# Altium PCB MKISEC 4L.PcbDoc
Units mm, origin at the board's own origin, x right, y up, seen from the top; angles counter-clockwise.
Board outline 61 x 34.4 mm, 4 copper layers (Top Layer, Int1, Int2, Bottom Layer), stack 1.586 mm thick; 2 components, 1 nets, 16 pads, 11 vias.
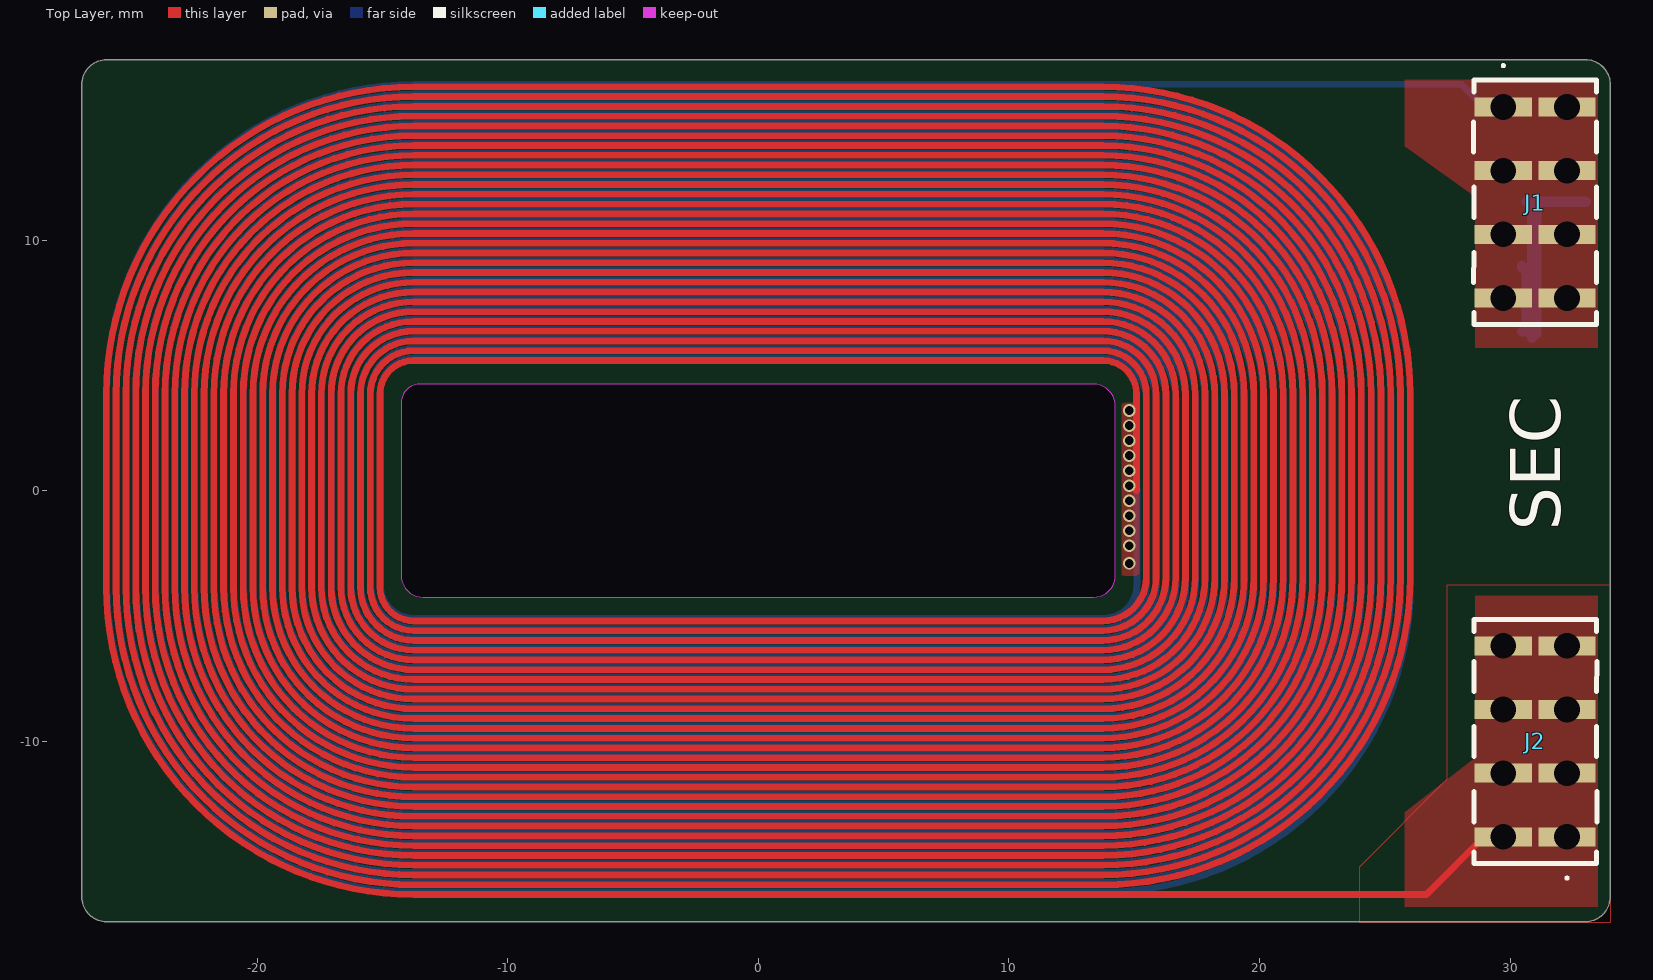
[diagram p0: Top Layer view]
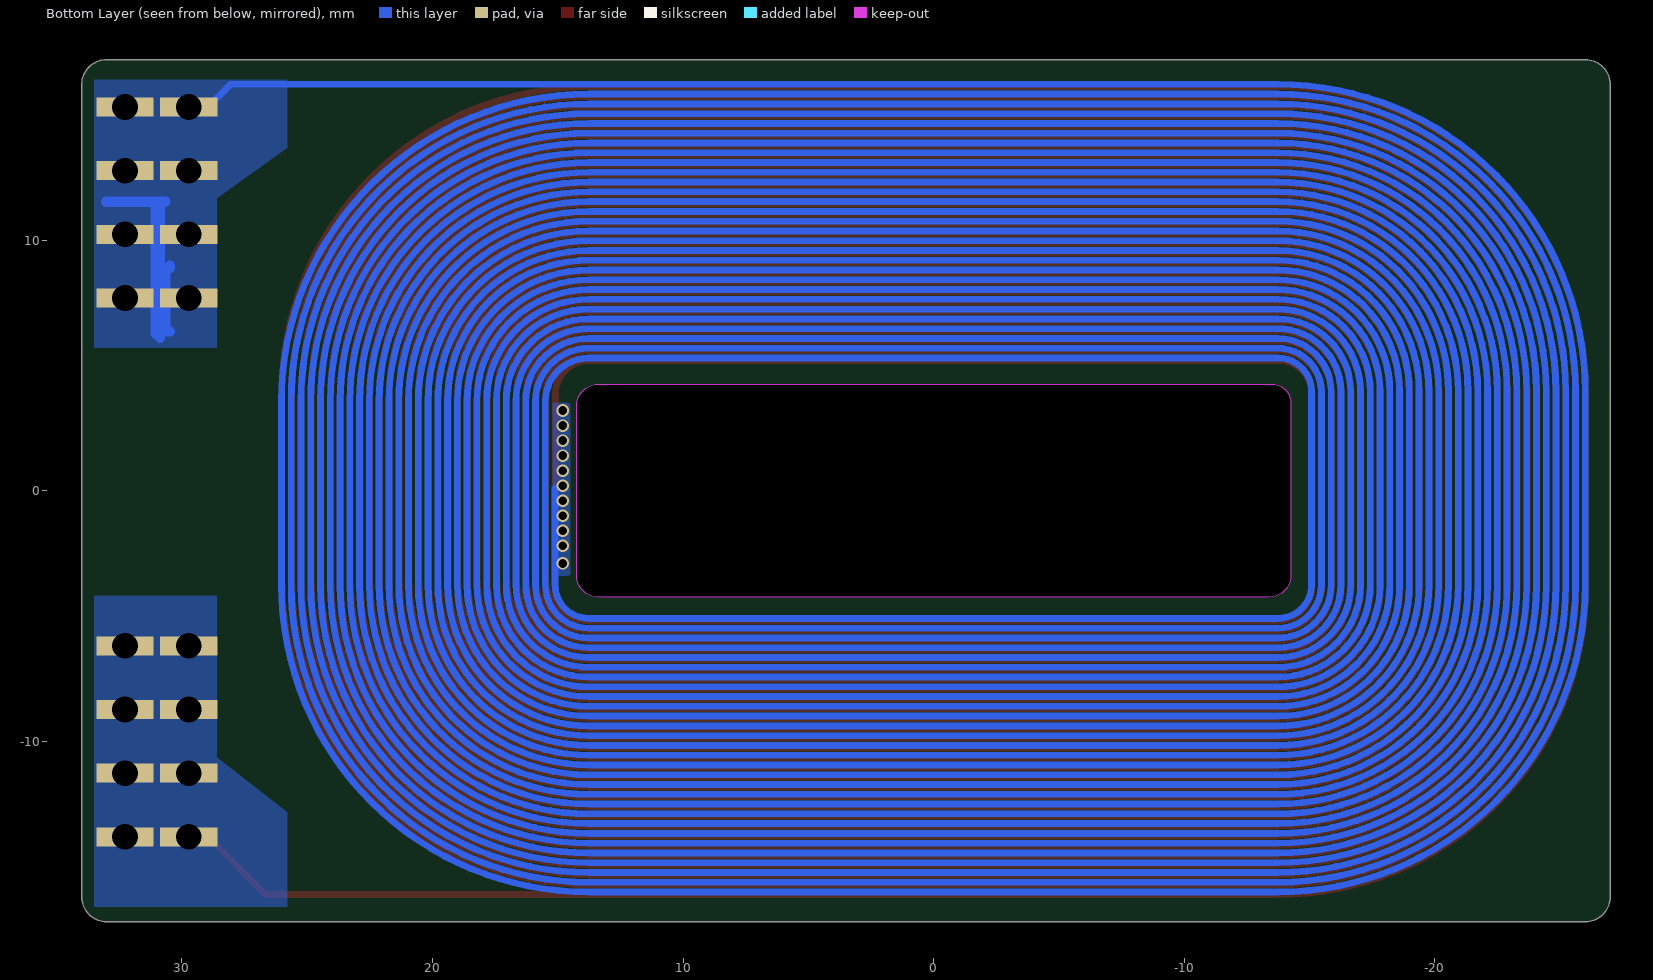
[diagram p1: Bottom Layer view, seen from below]
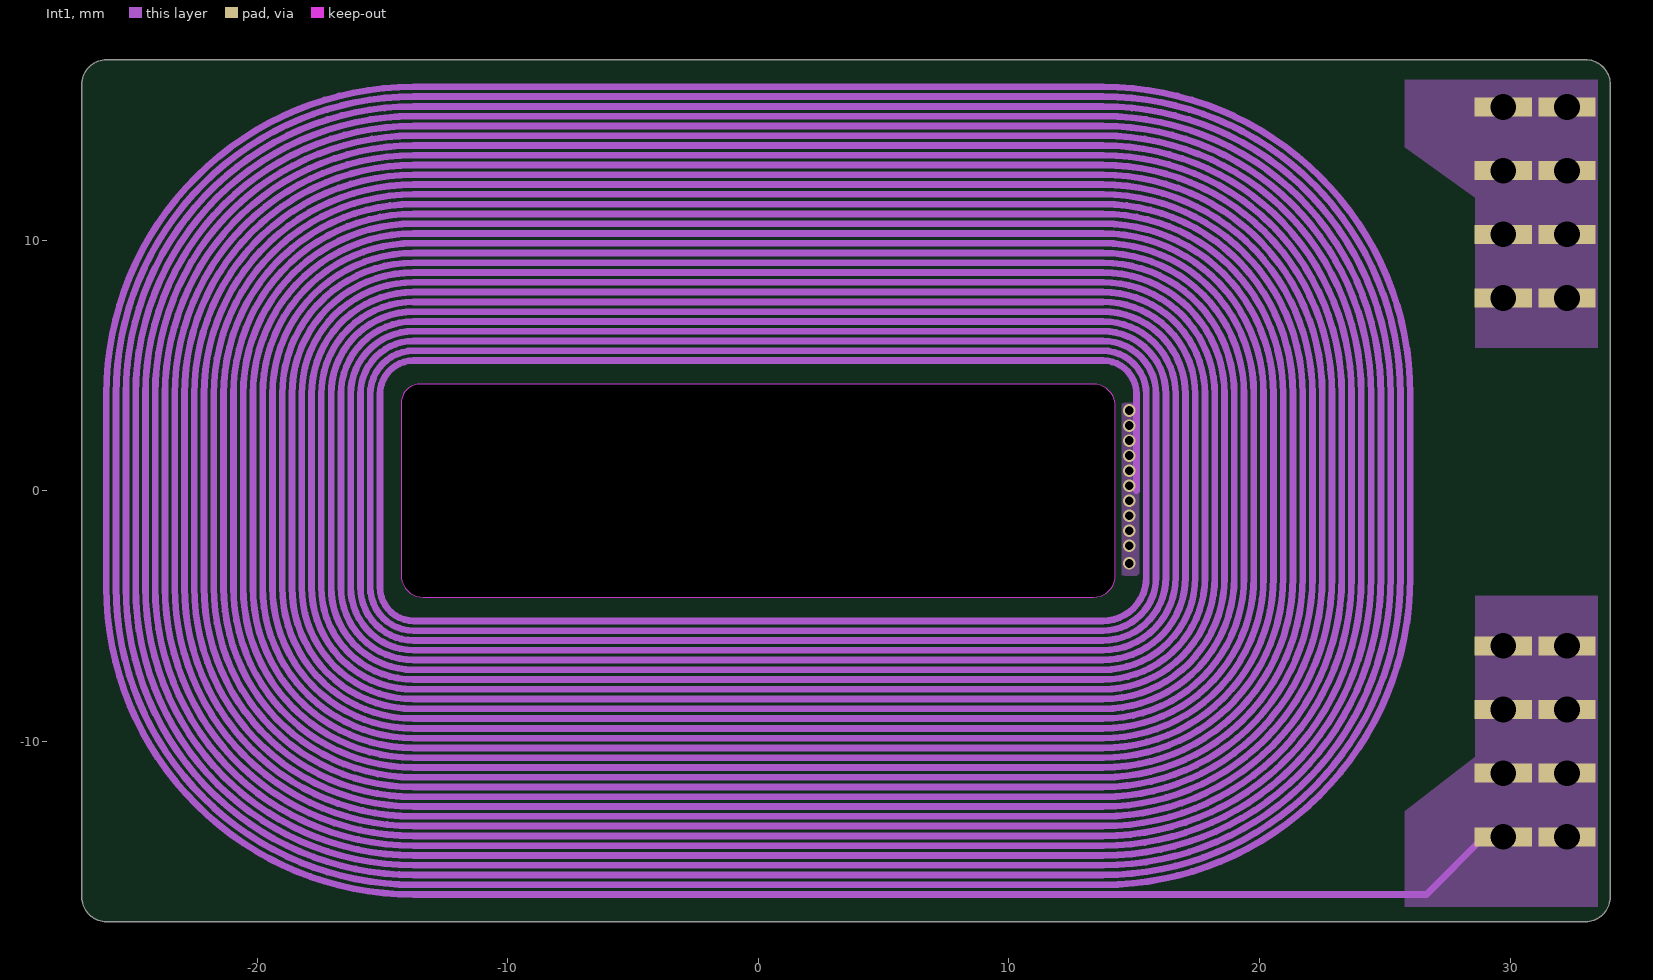
[diagram p2: Int1]
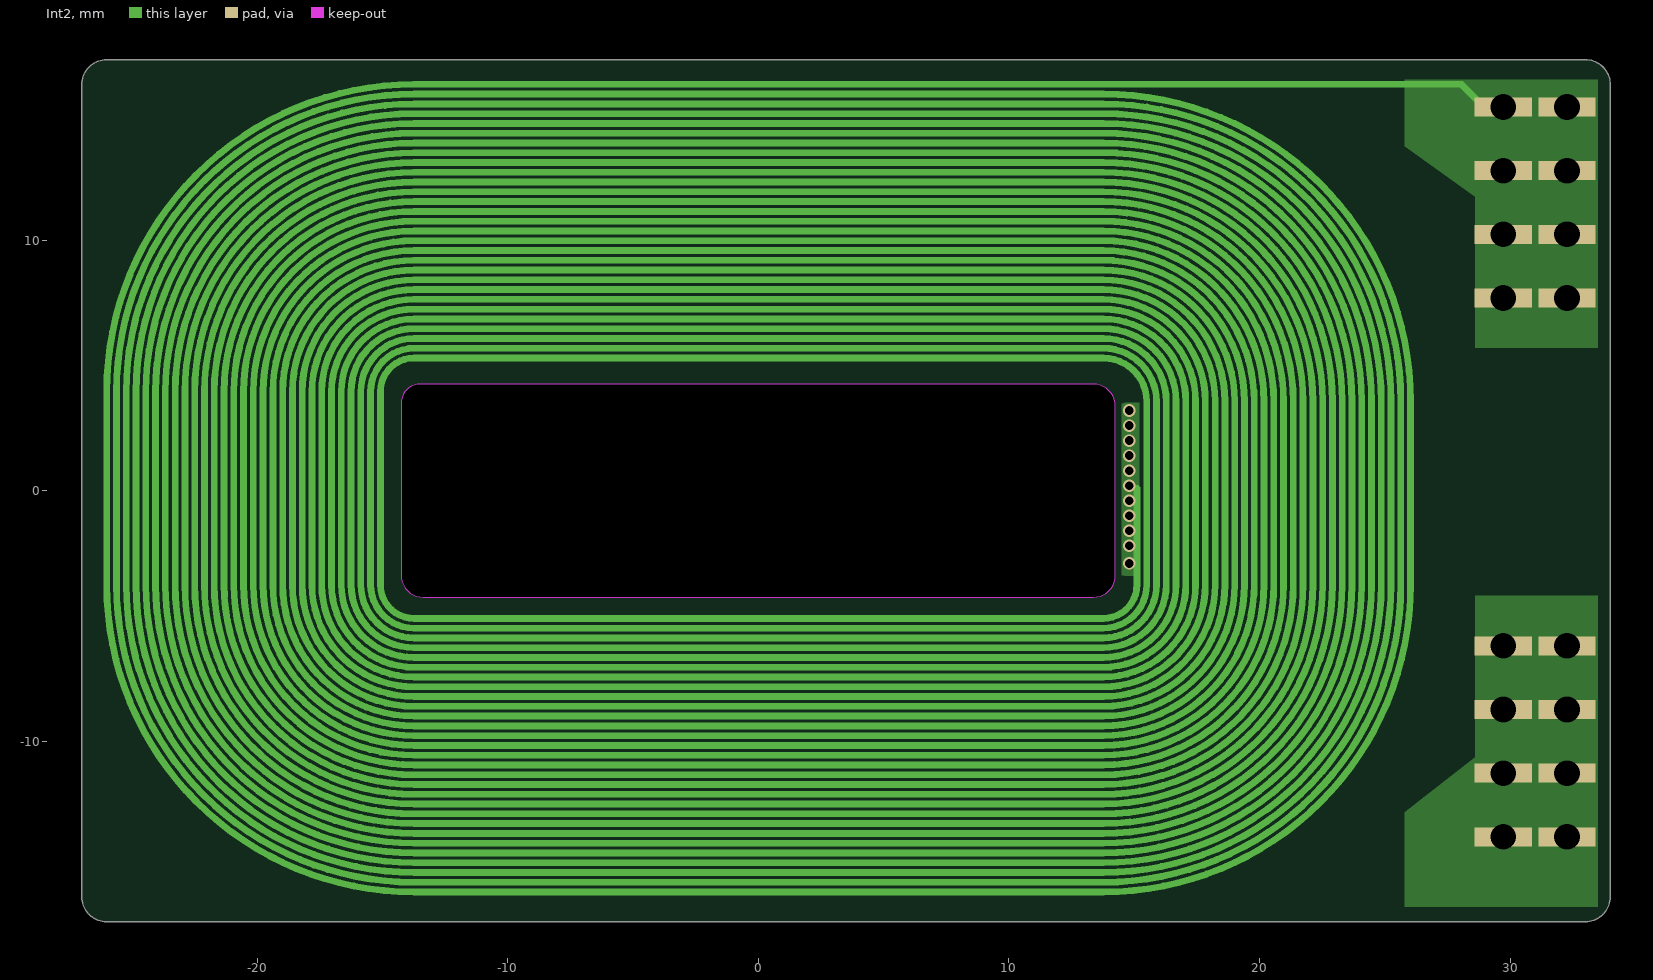
[diagram p3: Int2]

## Layer stack, top to bottom
Top Solder: solder mask 0.0254, SM-001, Dk 4
Top Layer: signal copper 0.035
Dielectric 2: prepreg 0.2104, PP-017, Dk 4.3
Int1: signal copper 0.0152
Dielectric 3: core 1.065, Core-039, Dk 4.8
Int2: signal copper 0.0152
Dielectric 4: prepreg 0.2104, PP-017, Dk 4.3
Bottom Layer: signal copper 0.035
Bottom Solder: solder mask 0.0254, SM-001, Dk 4

## Board outline
-26,-17.2 cw(c-26,-16.2) -27,-16.2 -27,16.2 cw(c-26,16.2) -26,17.2 33,17.2 cw(c33,16.2) 34,16.2 34,-16.2 cw(c33,-16.2) 33,-17.2
cut-out: 13.375,-4.25 ccw(c13.375,-3.375) 14.25,-3.375 14.25,3.375 ccw(c13.375,3.375) 13.375,4.25 -13.5,4.25 ccw(c-13.5,3.5) -14.25,3.5 -14.25,-3.375 ccw(c-13.375,-3.375) -13.375,-4.25

## Design rules (kind name [scope] priority, off if disabled: settings)
BoardOutlineClearance [All] p1: gap=0.2 ignorepadtopadclearanceinfootprint=FALSE
Clearance [All] p1: gap=0.2 ignorepadtopadclearanceinfootprint=FALSE except(0.09: Arc-Arc Arc-Track Track-Track; 0.1: SMDPad-Via; 0.127: SMDPad-SMDPad SMDPad-THPad; 0.15: Arc-Text Track-Text SMDPad-Text THPad-Text Via-Text Fill-Text Poly-Text Region-Text; 0.25: THPad-Via THPad-Fill THPad-Poly THPad-Region Fill-Fill Fill-Poly Fill-Region Fill-Hole Poly-Poly Poly-Region Poly-Hole Region-Region Region-Hole; 0.254: Arc-Via Arc-Hole Track-Via Track-Hole Via-Via; 0.5: THPad-THPad)
Creepage [All] p1: checkdistance=0.1
HoleSize [All] p1: absolutevalues=TRUE maxlimit=400 minlimit=0.15 maxpercent=80.000 minpercent=20.000
HoleToHoleClearance [All] p1: gap=0.5 allowstackedmicrovias=TRUE
MinimumAnnularRing MinimumAnnularRing_1 [All] p1: minimumring=0.254
MinimumSolderMaskSliver [All] p1: minsoldermaskwidth=0.05
PlaneClearance [All] p1: clearance=0.35
PolygonConnect POW [InNetClass('POW')] p1: connectstyle=Direct reliefconductorwidth=0.254 reliefentries=4 polygonreliefangle="90 Angle" airgapwidth=0.254
PolygonConnect Polygon_GND [InNet('GND')] p2: connectstyle=Direct reliefconductorwidth=0.5 reliefentries=4 polygonreliefangle="45 Angle" airgapwidth=0.25
PolygonConnect "General Polygons" [All] p3: connectstyle=Direct reliefconductorwidth=0.3 reliefentries=4 polygonreliefangle="90 Angle" airgapwidth=0.25
RoutingVias [All] p1: holewidth=0.45 width=0.4 viastyle="Through Hole" minholewidth=0.15 minwidth=0.25 maxholewidth=6.3 maxwidth=2
SilkToSolderMaskClearance SilkToSolderMaskClearance_1 [All] p1: minsilkscreentomaskgap=0.05 clearancetoexposedcopper=TRUE
SolderMaskExpansion SolderMaskExpansion_1 [All] p1: expansion=0.102 istentingtop=FALSE
UnRoutedNet [All] p1: checkbadconnections=TRUE
Width [All] p1: maxlimit=1 minlimit=0.09 preferedwidth=0.4 minimp=50.000000 maximp=50.000000 favimp=50.000000
24 further rules are at their usual default settings.

## Components (designator, comment, footprint, x,y, rotation, side; value= is the part's Value field where it differs from the comment)
J1 "5-146254-4" 51462544 31,11.5 r270 top
J2 "5-146254-4" 51462544 31,-10 r90 top

## Footprints (in the part's own frame and the unit in brackets; to place one, negate y for a bottom-side part, rotate by r counter-clockwise, add the part's x,y. Pads: shape width x height; smd on the part's side, far side on the other; paste and mask are expansions set on the pad)
51462544 [mm]
  rect 0.76x2.29 hole 1.02: 1(-3.81,-1.27) 2(-3.81,1.27) 3(-1.27,-1.27) 4(-1.27,1.27) 5(1.27,-1.27) 6(1.27,1.27) 7(3.81,-1.27) 8(3.81,1.27)
  silkscreen extent -5.51,-2.47 4.87,2.44, body extent -4.88,-2.45 4.88,2.43, height 8.2

## Part data
J1 J2: "Connector", Manufacturer_Name="TE Connectivity", Mouser Part Number=571-5-146254-4, Datasheet Link=https://www.te.com/commerce/DocumentDelivery/DDEController?Action=srchrtrv&DocNm=1307819_AMPMODU&DocType=Data+Sheet&DocLang=English&PartCntxt=5-146254-4&DocFormat=pdf, Height=8.21mm, Manufacturer_Part_Number=5-146254-4, Mouser Price/Stock=https://www.mouser.co.uk/ProductDetail/TE-Connectivity/5-146254-4?qs=bwpFY26eRVegfj1X1pwXFA%3D%3D

## Via types
v1: diameter 0.5, hole 0.35, Top Layer to Bottom Layer, tented both sides, 11 vias

## Nets (pads, with @x,y where several pads share a name; then routed paths per layer and width w, separated by ;. In a path a pad name is that pad's centre, name@x,y a point inside that pad or via, vN(x,y) a via of type N, cw(c..) or ccw(c..) an arc to the next point about the centre after c; other vN are vias at no path point)
primary: J1.1 J1.2 J1.3 J1.4 J1.5 J1.6 J1.7 J1.8 J2.1 J2.2 J2.3 J2.4 J2.5 J2.6 J2.7 J2.8 | length 13140.9
  Top Layer w0.27: 15.095,0 15.095,3.85 ccw(c13.75,3.85) 13.75,5.195 -13.75,5.195 ccw(c-13.75,3.85) -15.095,3.85 -15.095,-3.85 ccw(c-13.75,-3.85) -13.75,-5.195 13.75,-5.195 ccw(c13.75,-3.46) 15.485,-3.46 15.485,3.85 ccw(c13.75,3.85) 13.75,5.585 -13.75,5.585 ccw(c-13.75,3.85) -15.485,3.85 -15.485,-3.85 ccw(c-13.75,-3.85) -13.75,-5.585 13.75,-5.585 ccw(c13.75,-3.46) 15.875,-3.46 15.875,3.85 ccw(c13.75,3.85) 13.75,5.975 -13.75,5.975 ccw(c-13.75,3.85) -15.875,3.85 -15.875,-3.85 ccw(c-13.75,-3.85) -13.75,-5.975 13.75,-5.975 ccw(c13.75,-3.46) 16.265,-3.46 16.265,3.85 ccw(c13.75,3.85) 13.75,6.365 -13.75,6.365 ccw(c-13.75,3.85) -16.265,3.85 -16.265,-3.85 ccw(c-13.75,-3.85) -13.75,-6.365 13.75,-6.365 ccw(c13.75,-3.46) 16.655,-3.46 16.655,3.85 ccw(c13.75,3.85) 13.75,6.755 -13.75,6.755 ccw(c-13.75,3.85) -16.655,3.85 -16.655,-3.85 ccw(c-13.75,-3.85) -13.75,-6.755 13.75,-6.755 ccw(c13.75,-3.46) 17.045,-3.46 17.045,3.85 ccw(c13.75,3.85) 13.75,7.145 -13.75,7.145 ccw(c-13.75,3.85) -17.045,3.85 -17.045,-3.85 ccw(c-13.75,-3.85) -13.75,-7.145 13.75,-7.145 ccw(c13.75,-3.46) 17.435,-3.46 17.435,3.85 ccw(c13.75,3.85) 13.75,7.535 -13.75,7.535 ccw(c-13.75,3.85) -17.435,3.85 -17.435,-3.85 ccw(c-13.75,-3.85) -13.75,-7.535 13.75,-7.535 ccw(c13.75,-3.46) 17.825,-3.46 17.825,3.85 ccw(c13.75,3.85) 13.75,7.925 -13.75,7.925 ccw(c-13.75,3.85) -17.825,3.85 -17.825,-3.85 ccw(c-13.75,-3.85) -13.75,-7.925 13.75,-7.925 ccw(c13.75,-3.46) 18.215,-3.46 18.215,3.85 ccw(c13.75,3.85) 13.75,8.315 -13.75,8.315 ccw(c-13.75,3.85) -18.215,3.85 -18.215,-3.85 ccw(c-13.75,-3.85) -13.75,-8.315 13.75,-8.315 ccw(c13.75,-3.46) 18.605,-3.46 18.605,3.85 ccw(c13.75,3.85) 13.75,8.705 -13.75,8.705 ccw(c-13.75,3.85) -18.605,3.85 -18.605,-3.85 ccw(c-13.75,-3.85) -13.75,-8.705 13.75,-8.705 ccw(c13.75,-3.46) 18.995,-3.46 18.995,3.85 ccw(c13.75,3.85) 13.75,9.095 -13.75,9.095 ccw(c-13.75,3.85) -18.995,3.85 -18.995,-3.85 ccw(c-13.75,-3.85) -13.75,-9.095 13.75,-9.095 ccw(c13.75,-3.46) 19.385,-3.46 19.385,3.85 ccw(c13.75,3.85) 13.75,9.485 -13.75,9.485 ccw(c-13.75,3.85) -19.385,3.85 -19.385,-3.85 ccw(c-13.75,-3.85) -13.75,-9.485 13.75,-9.485 ccw(c13.75,-3.46) 19.775,-3.46 19.775,3.85 ccw(c13.75,3.85) 13.75,9.875 -13.75,9.875 ccw(c-13.75,3.85) -19.775,3.85 -19.775,-3.85 ccw(c-13.75,-3.85) -13.75,-9.875 13.75,-9.875 ccw(c13.75,-3.46) 20.165,-3.46 20.165,3.85 ccw(c13.75,3.85) 13.75,10.265 -13.75,10.265 ccw(c-13.75,3.85) -20.165,3.85 -20.165,-3.85 ccw(c-13.75,-3.85) -13.75,-10.265 13.75,-10.265 ccw(c13.75,-3.46) 20.555,-3.46 20.555,3.85 ccw(c13.75,3.85) 13.75,10.655 -13.75,10.655 ccw(c-13.75,3.85) -20.555,3.85 -20.555,-3.85 ccw(c-13.75,-3.85) -13.75,-10.655 13.75,-10.655 ccw(c13.75,-3.46) 20.945,-3.46 20.945,3.85 ccw(c13.75,3.85) 13.75,11.045 -13.75,11.045 ccw(c-13.75,3.85) -20.945,3.85 -20.945,-3.85 ccw(c-13.75,-3.85) -13.75,-11.045 13.75,-11.045 ccw(c13.75,-3.46) 21.335,-3.46 21.335,3.85 ccw(c13.75,3.85) 13.75,11.435 -13.75,11.435 ccw(c-13.75,3.85) -21.335,3.85 -21.335,-3.85 ccw(c-13.75,-3.85) -13.75,-11.435 13.75,-11.435 ccw(c13.75,-3.46) 21.725,-3.46 21.725,3.85 ccw(c13.75,3.85) 13.75,11.825 -13.75,11.825 ccw(c-13.75,3.85) -21.725,3.85 -21.725,-3.85 ccw(c-13.75,-3.85) -13.75,-11.825 13.75,-11.825 ccw(c13.75,-3.46) 22.115,-3.46 22.115,3.85 ccw(c13.75,3.85) 13.75,12.215 -13.75,12.215 ccw(c-13.75,3.85) -22.115,3.85 -22.115,-3.85 ccw(c-13.75,-3.85) -13.75,-12.215 13.75,-12.215 ccw(c13.75,-3.46) 22.505,-3.46 22.505,3.85 ccw(c13.75,3.85) 13.75,12.605 -13.75,12.605 ccw(c-13.75,3.85) -22.505,3.85 -22.505,-3.85 ccw(c-13.75,-3.85) -13.75,-12.605 13.75,-12.605 ccw(c13.75,-3.46) 22.895,-3.46 22.895,3.85 ccw(c13.75,3.85) 13.75,12.995 -13.75,12.995 ccw(c-13.75,3.85) -22.895,3.85 -22.895,-3.85 ccw(c-13.75,-3.85) -13.75,-12.995 13.75,-12.995 ccw(c13.75,-3.46) 23.285,-3.46 23.285,3.85 ccw(c13.75,3.85) 13.75,13.385 -13.75,13.385 ccw(c-13.75,3.85) -23.285,3.85 -23.285,-3.85 ccw(c-13.75,-3.85) -13.75,-13.385 13.75,-13.385 ccw(c13.75,-3.46) 23.675,-3.46 23.675,3.85 ccw(c13.75,3.85) 13.75,13.775 -13.75,13.775 ccw(c-13.75,3.85) -23.675,3.85 -23.675,-3.85 ccw(c-13.75,-3.85) -13.75,-13.775 13.75,-13.775 ccw(c13.75,-3.46) 24.065,-3.46 24.065,3.85 ccw(c13.75,3.85) 13.75,14.165 -13.75,14.165 ccw(c-13.75,3.85) -24.065,3.85 -24.065,-3.85 ccw(c-13.75,-3.85) -13.75,-14.165 13.75,-14.165 ccw(c13.75,-3.46) 24.455,-3.46 24.455,3.85 ccw(c13.75,3.85) 13.75,14.555 -13.75,14.555 ccw(c-13.75,3.85) -24.455,3.85 -24.455,-3.85 ccw(c-13.75,-3.85) -13.75,-14.555 13.75,-14.555 ccw(c13.75,-3.46) 24.845,-3.46 24.845,3.85 ccw(c13.75,3.85) 13.75,14.945 -13.75,14.945 ccw(c-13.75,3.85) -24.845,3.85 -24.845,-3.85 ccw(c-13.75,-3.85) -13.75,-14.945 13.75,-14.945 ccw(c13.75,-3.46) 25.235,-3.46 25.235,3.85 ccw(c13.75,3.85) 13.75,15.335 -13.75,15.335 ccw(c-13.75,3.85) -25.235,3.85 -25.235,-3.85 ccw(c-13.75,-3.85) -13.75,-15.335 13.75,-15.335 ccw(c13.75,-3.46) 25.625,-3.46 25.625,3.85 ccw(c13.75,3.85) 13.75,15.725 -13.75,15.725 ccw(c-13.75,3.85) -25.625,3.85 -25.625,-3.85 ccw(c-13.75,-3.85) -13.75,-15.725 13.75,-15.725 ccw(c13.75,-3.46) 26.015,-3.46 26.015,3.85 ccw(c13.75,3.85) 13.75,16.115 -13.75,16.115 ccw(c-13.75,3.85) -26.015,3.85 -26.015,-3.85 ccw(c-13.75,-3.85) -13.75,-16.115 26.66,-16.115 28.965,-13.81 J2.2
  Int1 w0.27: 15.095,0 15.095,3.85 ccw(c13.75,3.85) 13.75,5.195 -13.75,5.195 ccw(c-13.75,3.85) -15.095,3.85 -15.095,-3.85 ccw(c-13.75,-3.85) -13.75,-5.195 13.75,-5.195 ccw(c13.75,-3.46) 15.485,-3.46 15.485,3.85 ccw(c13.75,3.85) 13.75,5.585 -13.75,5.585 ccw(c-13.75,3.85) -15.485,3.85 -15.485,-3.85 ccw(c-13.75,-3.85) -13.75,-5.585 13.75,-5.585 ccw(c13.75,-3.46) 15.875,-3.46 15.875,3.85 ccw(c13.75,3.85) 13.75,5.975 -13.75,5.975 ccw(c-13.75,3.85) -15.875,3.85 -15.875,-3.85 ccw(c-13.75,-3.85) -13.75,-5.975 13.75,-5.975 ccw(c13.75,-3.46) 16.265,-3.46 16.265,3.85 ccw(c13.75,3.85) 13.75,6.365 -13.75,6.365 ccw(c-13.75,3.85) -16.265,3.85 -16.265,-3.85 ccw(c-13.75,-3.85) -13.75,-6.365 13.75,-6.365 ccw(c13.75,-3.46) 16.655,-3.46 16.655,3.85 ccw(c13.75,3.85) 13.75,6.755 -13.75,6.755 ccw(c-13.75,3.85) -16.655,3.85 -16.655,-3.85 ccw(c-13.75,-3.85) -13.75,-6.755 13.75,-6.755 ccw(c13.75,-3.46) 17.045,-3.46 17.045,3.85 ccw(c13.75,3.85) 13.75,7.145 -13.75,7.145 ccw(c-13.75,3.85) -17.045,3.85 -17.045,-3.85 ccw(c-13.75,-3.85) -13.75,-7.145 13.75,-7.145 ccw(c13.75,-3.46) 17.435,-3.46 17.435,3.85 ccw(c13.75,3.85) 13.75,7.535 -13.75,7.535 ccw(c-13.75,3.85) -17.435,3.85 -17.435,-3.85 ccw(c-13.75,-3.85) -13.75,-7.535 13.75,-7.535 ccw(c13.75,-3.46) 17.825,-3.46 17.825,3.85 ccw(c13.75,3.85) 13.75,7.925 -13.75,7.925 ccw(c-13.75,3.85) -17.825,3.85 -17.825,-3.85 ccw(c-13.75,-3.85) -13.75,-7.925 13.75,-7.925 ccw(c13.75,-3.46) 18.215,-3.46 18.215,3.85 ccw(c13.75,3.85) 13.75,8.315 -13.75,8.315 ccw(c-13.75,3.85) -18.215,3.85 -18.215,-3.85 ccw(c-13.75,-3.85) -13.75,-8.315 13.75,-8.315 ccw(c13.75,-3.46) 18.605,-3.46 18.605,3.85 ccw(c13.75,3.85) 13.75,8.705 -13.75,8.705 ccw(c-13.75,3.85) -18.605,3.85 -18.605,-3.85 ccw(c-13.75,-3.85) -13.75,-8.705 13.75,-8.705 ccw(c13.75,-3.46) 18.995,-3.46 18.995,3.85 ccw(c13.75,3.85) 13.75,9.095 -13.75,9.095 ccw(c-13.75,3.85) -18.995,3.85 -18.995,-3.85 ccw(c-13.75,-3.85) -13.75,-9.095 13.75,-9.095 ccw(c13.75,-3.46) 19.385,-3.46 19.385,3.85 ccw(c13.75,3.85) 13.75,9.485 -13.75,9.485 ccw(c-13.75,3.85) -19.385,3.85 -19.385,-3.85 ccw(c-13.75,-3.85) -13.75,-9.485 13.75,-9.485 ccw(c13.75,-3.46) 19.775,-3.46 19.775,3.85 ccw(c13.75,3.85) 13.75,9.875 -13.75,9.875 ccw(c-13.75,3.85) -19.775,3.85 -19.775,-3.85 ccw(c-13.75,-3.85) -13.75,-9.875 13.75,-9.875 ccw(c13.75,-3.46) 20.165,-3.46 20.165,3.85 ccw(c13.75,3.85) 13.75,10.265 -13.75,10.265 ccw(c-13.75,3.85) -20.165,3.85 -20.165,-3.85 ccw(c-13.75,-3.85) -13.75,-10.265 13.75,-10.265 ccw(c13.75,-3.46) 20.555,-3.46 20.555,3.85 ccw(c13.75,3.85) 13.75,10.655 -13.75,10.655 ccw(c-13.75,3.85) -20.555,3.85 -20.555,-3.85 ccw(c-13.75,-3.85) -13.75,-10.655 13.75,-10.655 ccw(c13.75,-3.46) 20.945,-3.46 20.945,3.85 ccw(c13.75,3.85) 13.75,11.045 -13.75,11.045 ccw(c-13.75,3.85) -20.945,3.85 -20.945,-3.85 ccw(c-13.75,-3.85) -13.75,-11.045 13.75,-11.045 ccw(c13.75,-3.46) 21.335,-3.46 21.335,3.85 ccw(c13.75,3.85) 13.75,11.435 -13.75,11.435 ccw(c-13.75,3.85) -21.335,3.85 -21.335,-3.85 ccw(c-13.75,-3.85) -13.75,-11.435 13.75,-11.435 ccw(c13.75,-3.46) 21.725,-3.46 21.725,3.85 ccw(c13.75,3.85) 13.75,11.825 -13.75,11.825 ccw(c-13.75,3.85) -21.725,3.85 -21.725,-3.85 ccw(c-13.75,-3.85) -13.75,-11.825 13.75,-11.825 ccw(c13.75,-3.46) 22.115,-3.46 22.115,3.85 ccw(c13.75,3.85) 13.75,12.215 -13.75,12.215 ccw(c-13.75,3.85) -22.115,3.85 -22.115,-3.85 ccw(c-13.75,-3.85) -13.75,-12.215 13.75,-12.215 ccw(c13.75,-3.46) 22.505,-3.46 22.505,3.85 ccw(c13.75,3.85) 13.75,12.605 -13.75,12.605 ccw(c-13.75,3.85) -22.505,3.85 -22.505,-3.85 ccw(c-13.75,-3.85) -13.75,-12.605 13.75,-12.605 ccw(c13.75,-3.46) 22.895,-3.46 22.895,3.85 ccw(c13.75,3.85) 13.75,12.995 -13.75,12.995 ccw(c-13.75,3.85) -22.895,3.85 -22.895,-3.85 ccw(c-13.75,-3.85) -13.75,-12.995 13.75,-12.995 ccw(c13.75,-3.46) 23.285,-3.46 23.285,3.85 ccw(c13.75,3.85) 13.75,13.385 -13.75,13.385 ccw(c-13.75,3.85) -23.285,3.85 -23.285,-3.85 ccw(c-13.75,-3.85) -13.75,-13.385 13.75,-13.385 ccw(c13.75,-3.46) 23.675,-3.46 23.675,3.85 ccw(c13.75,3.85) 13.75,13.775 -13.75,13.775 ccw(c-13.75,3.85) -23.675,3.85 -23.675,-3.85 ccw(c-13.75,-3.85) -13.75,-13.775 13.75,-13.775 ccw(c13.75,-3.46) 24.065,-3.46 24.065,3.85 ccw(c13.75,3.85) 13.75,14.165 -13.75,14.165 ccw(c-13.75,3.85) -24.065,3.85 -24.065,-3.85 ccw(c-13.75,-3.85) -13.75,-14.165 13.75,-14.165 ccw(c13.75,-3.46) 24.455,-3.46 24.455,3.85 ccw(c13.75,3.85) 13.75,14.555 -13.75,14.555 ccw(c-13.75,3.85) -24.455,3.85 -24.455,-3.85 ccw(c-13.75,-3.85) -13.75,-14.555 13.75,-14.555 ccw(c13.75,-3.46) 24.845,-3.46 24.845,3.85 ccw(c13.75,3.85) 13.75,14.945 -13.75,14.945 ccw(c-13.75,3.85) -24.845,3.85 -24.845,-3.85 ccw(c-13.75,-3.85) -13.75,-14.945 13.75,-14.945 ccw(c13.75,-3.46) 25.235,-3.46 25.235,3.85 ccw(c13.75,3.85) 13.75,15.335 -13.75,15.335 ccw(c-13.75,3.85) -25.235,3.85 -25.235,-3.85 ccw(c-13.75,-3.85) -13.75,-15.335 13.75,-15.335 ccw(c13.75,-3.46) 25.625,-3.46 25.625,3.85 ccw(c13.75,3.85) 13.75,15.725 -13.75,15.725 ccw(c-13.75,3.85) -25.625,3.85 -25.625,-3.85 ccw(c-13.75,-3.85) -13.75,-15.725 13.75,-15.725 ccw(c13.75,-3.46) 26.015,-3.46 26.015,3.85 ccw(c13.75,3.85) 13.75,16.115 -13.75,16.115 ccw(c-13.75,3.85) -26.015,3.85 -26.015,-3.85 ccw(c-13.75,-3.85) -13.75,-16.115 26.66,-16.115 28.965,-13.81 J2.2
  Int2 w0.27: 15.11,0.1 15.11,-3.75 cw(c13.765,-3.75) 13.765,-5.095 -13.735,-5.095 cw(c-13.735,-3.75) -15.08,-3.75 -15.08,3.95 cw(c-13.735,3.95) -13.735,5.295 13.765,5.295 cw(c13.765,3.56) 15.5,3.56 15.5,-3.75 cw(c13.765,-3.75) 13.765,-5.485 -13.735,-5.485 cw(c-13.735,-3.75) -15.47,-3.75 -15.47,3.95 cw(c-13.735,3.95) -13.735,5.685 13.765,5.685 cw(c13.765,3.56) 15.89,3.56 15.89,-3.75 cw(c13.765,-3.75) 13.765,-5.875 -13.735,-5.875 cw(c-13.735,-3.75) -15.86,-3.75 -15.86,3.95 cw(c-13.735,3.95) -13.735,6.075 13.765,6.075 cw(c13.765,3.56) 16.28,3.56 16.28,-3.75 cw(c13.765,-3.75) 13.765,-6.265 -13.735,-6.265 cw(c-13.735,-3.75) -16.25,-3.75 -16.25,3.95 cw(c-13.735,3.95) -13.735,6.465 13.765,6.465 cw(c13.765,3.56) 16.67,3.56 16.67,-3.75 cw(c13.765,-3.75) 13.765,-6.655 -13.735,-6.655 cw(c-13.735,-3.75) -16.64,-3.75 -16.64,3.95 cw(c-13.735,3.95) -13.735,6.855 13.765,6.855 cw(c13.765,3.56) 17.06,3.56 17.06,-3.75 cw(c13.765,-3.75) 13.765,-7.045 -13.735,-7.045 cw(c-13.735,-3.75) -17.03,-3.75 -17.03,3.95 cw(c-13.735,3.95) -13.735,7.245 13.765,7.245 cw(c13.765,3.56) 17.45,3.56 17.45,-3.75 cw(c13.765,-3.75) 13.765,-7.435 -13.735,-7.435 cw(c-13.735,-3.75) -17.42,-3.75 -17.42,3.95 cw(c-13.735,3.95) -13.735,7.635 13.765,7.635 cw(c13.765,3.56) 17.84,3.56 17.84,-3.75 cw(c13.765,-3.75) 13.765,-7.825 -13.735,-7.825 cw(c-13.735,-3.75) -17.81,-3.75 -17.81,3.95 cw(c-13.735,3.95) -13.735,8.025 13.765,8.025 cw(c13.765,3.56) 18.23,3.56 18.23,-3.75 cw(c13.765,-3.75) 13.765,-8.215 -13.735,-8.215 cw(c-13.735,-3.75) -18.2,-3.75 -18.2,3.95 cw(c-13.735,3.95) -13.735,8.415 13.765,8.415 cw(c13.765,3.56) 18.62,3.56 18.62,-3.75 cw(c13.765,-3.75) 13.765,-8.605 -13.735,-8.605 cw(c-13.735,-3.75) -18.59,-3.75 -18.59,3.95 cw(c-13.735,3.95) -13.735,8.805 13.765,8.805 cw(c13.765,3.56) 19.01,3.56 19.01,-3.75 cw(c13.765,-3.75) 13.765,-8.995 -13.735,-8.995 cw(c-13.735,-3.75) -18.98,-3.75 -18.98,3.95 cw(c-13.735,3.95) -13.735,9.195 13.765,9.195 cw(c13.765,3.56) 19.4,3.56 19.4,-3.75 cw(c13.765,-3.75) 13.765,-9.385 -13.735,-9.385 cw(c-13.735,-3.75) -19.37,-3.75 -19.37,3.95 cw(c-13.735,3.95) -13.735,9.585 13.765,9.585 cw(c13.765,3.56) 19.79,3.56 19.79,-3.75 cw(c13.765,-3.75) 13.765,-9.775 -13.735,-9.775 cw(c-13.735,-3.75) -19.76,-3.75 -19.76,3.95 cw(c-13.735,3.95) -13.735,9.975 13.765,9.975 cw(c13.765,3.56) 20.18,3.56 20.18,-3.75 cw(c13.765,-3.75) 13.765,-10.165 -13.735,-10.165 cw(c-13.735,-3.75) -20.15,-3.75 -20.15,3.95 cw(c-13.735,3.95) -13.735,10.365 13.765,10.365 cw(c13.765,3.56) 20.57,3.56 20.57,-3.75 cw(c13.765,-3.75) 13.765,-10.555 -13.735,-10.555 cw(c-13.735,-3.75) -20.54,-3.75 -20.54,3.95 cw(c-13.735,3.95) -13.735,10.755 13.765,10.755 cw(c13.765,3.56) 20.96,3.56 20.96,-3.75 cw(c13.765,-3.75) 13.765,-10.945 -13.735,-10.945 cw(c-13.735,-3.75) -20.93,-3.75 -20.93,3.95 cw(c-13.735,3.95) -13.735,11.145 13.765,11.145 cw(c13.765,3.56) 21.35,3.56 21.35,-3.75 cw(c13.765,-3.75) 13.765,-11.335 -13.735,-11.335 cw(c-13.735,-3.75) -21.32,-3.75 -21.32,3.95 cw(c-13.735,3.95) -13.735,11.535 13.765,11.535 cw(c13.765,3.56) 21.74,3.56 21.74,-3.75 cw(c13.765,-3.75) 13.765,-11.725 -13.735,-11.725 cw(c-13.735,-3.75) -21.71,-3.75 -21.71,3.95 cw(c-13.735,3.95) -13.735,11.925 13.765,11.925 cw(c13.765,3.56) 22.13,3.56 22.13,-3.75 cw(c13.765,-3.75) 13.765,-12.115 -13.735,-12.115 cw(c-13.735,-3.75) -22.1,-3.75 -22.1,3.95 cw(c-13.735,3.95) -13.735,12.315 13.765,12.315 cw(c13.765,3.56) 22.52,3.56 22.52,-3.75 cw(c13.765,-3.75) 13.765,-12.505 -13.735,-12.505 cw(c-13.735,-3.75) -22.49,-3.75 -22.49,3.95 cw(c-13.735,3.95) -13.735,12.705 13.765,12.705 cw(c13.765,3.56) 22.91,3.56 22.91,-3.75 cw(c13.765,-3.75) 13.765,-12.895 -13.735,-12.895 cw(c-13.735,-3.75) -22.88,-3.75 -22.88,3.95 cw(c-13.735,3.95) -13.735,13.095 13.765,13.095 cw(c13.765,3.56) 23.3,3.56 23.3,-3.75 cw(c13.765,-3.75) 13.765,-13.285 -13.735,-13.285 cw(c-13.735,-3.75) -23.27,-3.75 -23.27,3.95 cw(c-13.735,3.95) -13.735,13.485 13.765,13.485 cw(c13.765,3.56) 23.69,3.56 23.69,-3.75 cw(c13.765,-3.75) 13.765,-13.675 -13.735,-13.675 cw(c-13.735,-3.75) -23.66,-3.75 -23.66,3.95 cw(c-13.735,3.95) -13.735,13.875 13.765,13.875 cw(c13.765,3.56) 24.08,3.56 24.08,-3.75 cw(c13.765,-3.75) 13.765,-14.065 -13.735,-14.065 cw(c-13.735,-3.75) -24.05,-3.75 -24.05,3.95 cw(c-13.735,3.95) -13.735,14.265 13.765,14.265 cw(c13.765,3.56) 24.47,3.56 24.47,-3.75 cw(c13.765,-3.75) 13.765,-14.455 -13.735,-14.455 cw(c-13.735,-3.75) -24.44,-3.75 -24.44,3.95 cw(c-13.735,3.95) -13.735,14.655 13.765,14.655 cw(c13.765,3.56) 24.86,3.56 24.86,-3.75 cw(c13.765,-3.75) 13.765,-14.845 -13.735,-14.845 cw(c-13.735,-3.75) -24.83,-3.75 -24.83,3.95 cw(c-13.735,3.95) -13.735,15.045 13.765,15.045 cw(c13.765,3.56) 25.25,3.56 25.25,-3.75 cw(c13.765,-3.75) 13.765,-15.235 -13.735,-15.235 cw(c-13.735,-3.75) -25.22,-3.75 -25.22,3.95 cw(c-13.735,3.95) -13.735,15.435 13.765,15.435 cw(c13.765,3.56) 25.64,3.56 25.64,-3.75 cw(c13.765,-3.75) 13.765,-15.625 -13.735,-15.625 cw(c-13.735,-3.75) -25.61,-3.75 -25.61,3.95 cw(c-13.735,3.95) -13.735,15.825 13.765,15.825 cw(c13.765,3.56) 26.03,3.56 26.03,-3.75 cw(c13.765,-3.75) 13.765,-16.015 -13.735,-16.015 cw(c-13.735,-3.75) -26,-3.75 -26,3.95 cw(c-13.735,3.95) -13.735,16.215 28.06,16.215 28.965,15.31 J1.1
  Bottom Layer w0.27: 15.11,0.1 15.11,-3.75 cw(c13.765,-3.75) 13.765,-5.095 -13.735,-5.095 cw(c-13.735,-3.75) -15.08,-3.75 -15.08,3.95 cw(c-13.735,3.95) -13.735,5.295 13.765,5.295 cw(c13.765,3.56) 15.5,3.56 15.5,-3.75 cw(c13.765,-3.75) 13.765,-5.485 -13.735,-5.485 cw(c-13.735,-3.75) -15.47,-3.75 -15.47,3.95 cw(c-13.735,3.95) -13.735,5.685 13.765,5.685 cw(c13.765,3.56) 15.89,3.56 15.89,-3.75 cw(c13.765,-3.75) 13.765,-5.875 -13.735,-5.875 cw(c-13.735,-3.75) -15.86,-3.75 -15.86,3.95 cw(c-13.735,3.95) -13.735,6.075 13.765,6.075 cw(c13.765,3.56) 16.28,3.56 16.28,-3.75 cw(c13.765,-3.75) 13.765,-6.265 -13.735,-6.265 cw(c-13.735,-3.75) -16.25,-3.75 -16.25,3.95 cw(c-13.735,3.95) -13.735,6.465 13.765,6.465 cw(c13.765,3.56) 16.67,3.56 16.67,-3.75 cw(c13.765,-3.75) 13.765,-6.655 -13.735,-6.655 cw(c-13.735,-3.75) -16.64,-3.75 -16.64,3.95 cw(c-13.735,3.95) -13.735,6.855 13.765,6.855 cw(c13.765,3.56) 17.06,3.56 17.06,-3.75 cw(c13.765,-3.75) 13.765,-7.045 -13.735,-7.045 cw(c-13.735,-3.75) -17.03,-3.75 -17.03,3.95 cw(c-13.735,3.95) -13.735,7.245 13.765,7.245 cw(c13.765,3.56) 17.45,3.56 17.45,-3.75 cw(c13.765,-3.75) 13.765,-7.435 -13.735,-7.435 cw(c-13.735,-3.75) -17.42,-3.75 -17.42,3.95 cw(c-13.735,3.95) -13.735,7.635 13.765,7.635 cw(c13.765,3.56) 17.84,3.56 17.84,-3.75 cw(c13.765,-3.75) 13.765,-7.825 -13.735,-7.825 cw(c-13.735,-3.75) -17.81,-3.75 -17.81,3.95 cw(c-13.735,3.95) -13.735,8.025 13.765,8.025 cw(c13.765,3.56) 18.23,3.56 18.23,-3.75 cw(c13.765,-3.75) 13.765,-8.215 -13.735,-8.215 cw(c-13.735,-3.75) -18.2,-3.75 -18.2,3.95 cw(c-13.735,3.95) -13.735,8.415 13.765,8.415 cw(c13.765,3.56) 18.62,3.56 18.62,-3.75 cw(c13.765,-3.75) 13.765,-8.605 -13.735,-8.605 cw(c-13.735,-3.75) -18.59,-3.75 -18.59,3.95 cw(c-13.735,3.95) -13.735,8.805 13.765,8.805 cw(c13.765,3.56) 19.01,3.56 19.01,-3.75 cw(c13.765,-3.75) 13.765,-8.995 -13.735,-8.995 cw(c-13.735,-3.75) -18.98,-3.75 -18.98,3.95 cw(c-13.735,3.95) -13.735,9.195 13.765,9.195 cw(c13.765,3.56) 19.4,3.56 19.4,-3.75 cw(c13.765,-3.75) 13.765,-9.385 -13.735,-9.385 cw(c-13.735,-3.75) -19.37,-3.75 -19.37,3.95 cw(c-13.735,3.95) -13.735,9.585 13.765,9.585 cw(c13.765,3.56) 19.79,3.56 19.79,-3.75 cw(c13.765,-3.75) 13.765,-9.775 -13.735,-9.775 cw(c-13.735,-3.75) -19.76,-3.75 -19.76,3.95 cw(c-13.735,3.95) -13.735,9.975 13.765,9.975 cw(c13.765,3.56) 20.18,3.56 20.18,-3.75 cw(c13.765,-3.75) 13.765,-10.165 -13.735,-10.165 cw(c-13.735,-3.75) -20.15,-3.75 -20.15,3.95 cw(c-13.735,3.95) -13.735,10.365 13.765,10.365 cw(c13.765,3.56) 20.57,3.56 20.57,-3.75 cw(c13.765,-3.75) 13.765,-10.555 -13.735,-10.555 cw(c-13.735,-3.75) -20.54,-3.75 -20.54,3.95 cw(c-13.735,3.95) -13.735,10.755 13.765,10.755 cw(c13.765,3.56) 20.96,3.56 20.96,-3.75 cw(c13.765,-3.75) 13.765,-10.945 -13.735,-10.945 cw(c-13.735,-3.75) -20.93,-3.75 -20.93,3.95 cw(c-13.735,3.95) -13.735,11.145 13.765,11.145 cw(c13.765,3.56) 21.35,3.56 21.35,-3.75 cw(c13.765,-3.75) 13.765,-11.335 -13.735,-11.335 cw(c-13.735,-3.75) -21.32,-3.75 -21.32,3.95 cw(c-13.735,3.95) -13.735,11.535 13.765,11.535 cw(c13.765,3.56) 21.74,3.56 21.74,-3.75 cw(c13.765,-3.75) 13.765,-11.725 -13.735,-11.725 cw(c-13.735,-3.75) -21.71,-3.75 -21.71,3.95 cw(c-13.735,3.95) -13.735,11.925 13.765,11.925 cw(c13.765,3.56) 22.13,3.56 22.13,-3.75 cw(c13.765,-3.75) 13.765,-12.115 -13.735,-12.115 cw(c-13.735,-3.75) -22.1,-3.75 -22.1,3.95 cw(c-13.735,3.95) -13.735,12.315 13.765,12.315 cw(c13.765,3.56) 22.52,3.56 22.52,-3.75 cw(c13.765,-3.75) 13.765,-12.505 -13.735,-12.505 cw(c-13.735,-3.75) -22.49,-3.75 -22.49,3.95 cw(c-13.735,3.95) -13.735,12.705 13.765,12.705 cw(c13.765,3.56) 22.91,3.56 22.91,-3.75 cw(c13.765,-3.75) 13.765,-12.895 -13.735,-12.895 cw(c-13.735,-3.75) -22.88,-3.75 -22.88,3.95 cw(c-13.735,3.95) -13.735,13.095 13.765,13.095 cw(c13.765,3.56) 23.3,3.56 23.3,-3.75 cw(c13.765,-3.75) 13.765,-13.285 -13.735,-13.285 cw(c-13.735,-3.75) -23.27,-3.75 -23.27,3.95 cw(c-13.735,3.95) -13.735,13.485 13.765,13.485 cw(c13.765,3.56) 23.69,3.56 23.69,-3.75 cw(c13.765,-3.75) 13.765,-13.675 -13.735,-13.675 cw(c-13.735,-3.75) -23.66,-3.75 -23.66,3.95 cw(c-13.735,3.95) -13.735,13.875 13.765,13.875 cw(c13.765,3.56) 24.08,3.56 24.08,-3.75 cw(c13.765,-3.75) 13.765,-14.065 -13.735,-14.065 cw(c-13.735,-3.75) -24.05,-3.75 -24.05,3.95 cw(c-13.735,3.95) -13.735,14.265 13.765,14.265 cw(c13.765,3.56) 24.47,3.56 24.47,-3.75 cw(c13.765,-3.75) 13.765,-14.455 -13.735,-14.455 cw(c-13.735,-3.75) -24.44,-3.75 -24.44,3.95 cw(c-13.735,3.95) -13.735,14.655 13.765,14.655 cw(c13.765,3.56) 24.86,3.56 24.86,-3.75 cw(c13.765,-3.75) 13.765,-14.845 -13.735,-14.845 cw(c-13.735,-3.75) -24.83,-3.75 -24.83,3.95 cw(c-13.735,3.95) -13.735,15.045 13.765,15.045 cw(c13.765,3.56) 25.25,3.56 25.25,-3.75 cw(c13.765,-3.75) 13.765,-15.235 -13.735,-15.235 cw(c-13.735,-3.75) -25.22,-3.75 -25.22,3.95 cw(c-13.735,3.95) -13.735,15.435 13.765,15.435 cw(c13.765,3.56) 25.64,3.56 25.64,-3.75 cw(c13.765,-3.75) 13.765,-15.625 -13.735,-15.625 cw(c-13.735,-3.75) -25.61,-3.75 -25.61,3.95 cw(c-13.735,3.95) -13.735,15.825 13.765,15.825 cw(c13.765,3.56) 26.03,3.56 26.03,-3.75 cw(c13.765,-3.75) 13.765,-16.015 -13.735,-16.015 cw(c-13.735,-3.75) -26,-3.75 -26,3.95 cw(c-13.735,3.95) -13.735,16.215 28.06,16.215 28.965,15.31 J1.1
  Bottom Layer w0.4: 30.48,6.35 30.66,6.35 ; 30.48,8.89 30.48,8.99 ; 30.66,6.45 30.66,8.89 ; 30.66,11.53 33.02,11.53 ; 30.88,6.1 30.88,6.25 ; 30.88,11.43 30.88,6.25 ; 31.06,11.33 31.06,6.25 30.88,6.25
  other v1: 14.8,-2.9 14.8,-2.2 14.8,-1.6 14.8,-1 14.8,-0.4 14.8,0.2 14.8,0.8 14.8,1.4 14.8,2 14.8,2.6 14.8,3.2

## Polygon pours and split planes (outlines as drawn)
primary on Bottom Layer "PRIMARY_L04_P009" (solid, pour order 9): 15.2,3.5 14.103,3.5 14.103,-3.4 15.2,-3.4
primary on Bottom Layer "PRIMARY_L04_P004" (solid, pour order 4): 25.8,-12.822 28.6,-10.644 28.6,-4.2 33.5,-4.2 33.5,-16.6 25.8,-16.6
primary on Bottom Layer "PRIMARY_L04_P000" (solid, pour order 0): 25.8,13.694 28.6,11.672 28.6,5.7 33.5,5.7 33.5,16.4 25.8,16.4
primary on Top Layer "PRIMARY_L01_P005" (solid, pour order 5): 25.8,-12.831 28.6,-10.662 28.6,-4.2 33.5,-4.2 33.5,-16.6 25.8,-16.6
primary on Top Layer "PRIMARY_L01_P007" (solid, pour order 7): 15.2,3.5 14.103,3.5 14.103,-3.4 15.2,-3.4
primary on Top Layer "PRIMARY_L01_P003" (solid, pour order 3): 25.8,13.75 28.6,11.728 28.6,5.7 33.5,5.7 33.5,16.4 25.8,16.4
primary on Top Layer "NONET_L01_P002" (solid, shelved, pour order 2): 24,-15 27.5,-11.5 27.5,-3.75 34,-3.75 34,-17.25 24,-17.25
primary on Int1 "PRIMARY_L02_P011" (solid, pour order 11): 25.8,-12.785 28.6,-10.615 28.6,-4.2 33.5,-4.2 33.5,-16.6 25.8,-16.6
primary on Int1 "PRIMARY_L02_P010" (solid, pour order 10): 25.8,13.711 28.6,11.689 28.6,5.7 33.5,5.7 33.5,16.4 25.8,16.4
primary on Int1 "PRIMARY_L02_P008" (solid, pour order 8): 15.2,3.5 14.103,3.5 14.103,-3.4 15.2,-3.4
primary on Int2 "PRIMARY_L03_P013" (solid, pour order 13): 25.8,13.75 28.6,11.728 28.6,5.7 33.5,5.7 33.5,16.4 25.8,16.4
primary on Int2 "PRIMARY_L03_P012" (solid, pour order 12): 25.8,-12.822 28.6,-10.644 28.6,-4.2 33.5,-4.2 33.5,-16.6 25.8,-16.6
primary on Int2 "PRIMARY_L03_P006" (solid, pour order 6): 15.2,3.5 14.103,3.5 14.103,-3.4 15.2,-3.4

## Silkscreen, mask and mechanical layers (free items; w line width, h text height)
Top Overlay:
  text "SEC" at 32,-1.6 h2 r90
Mechanical 15 (Mech15):
  the board outline again, w0.1